# Altium PCB mecanum_car_controller.PcbDoc
Units mil, origin at the board's own origin, x right, y up, seen from the top; angles counter-clockwise.
Board outline 6299.21 x 4133.86 mil, 2 copper layers (Top Layer, Bottom Layer), stack 23.517 mil thick; 44 components, 57 nets, 226 pads, 27 vias.
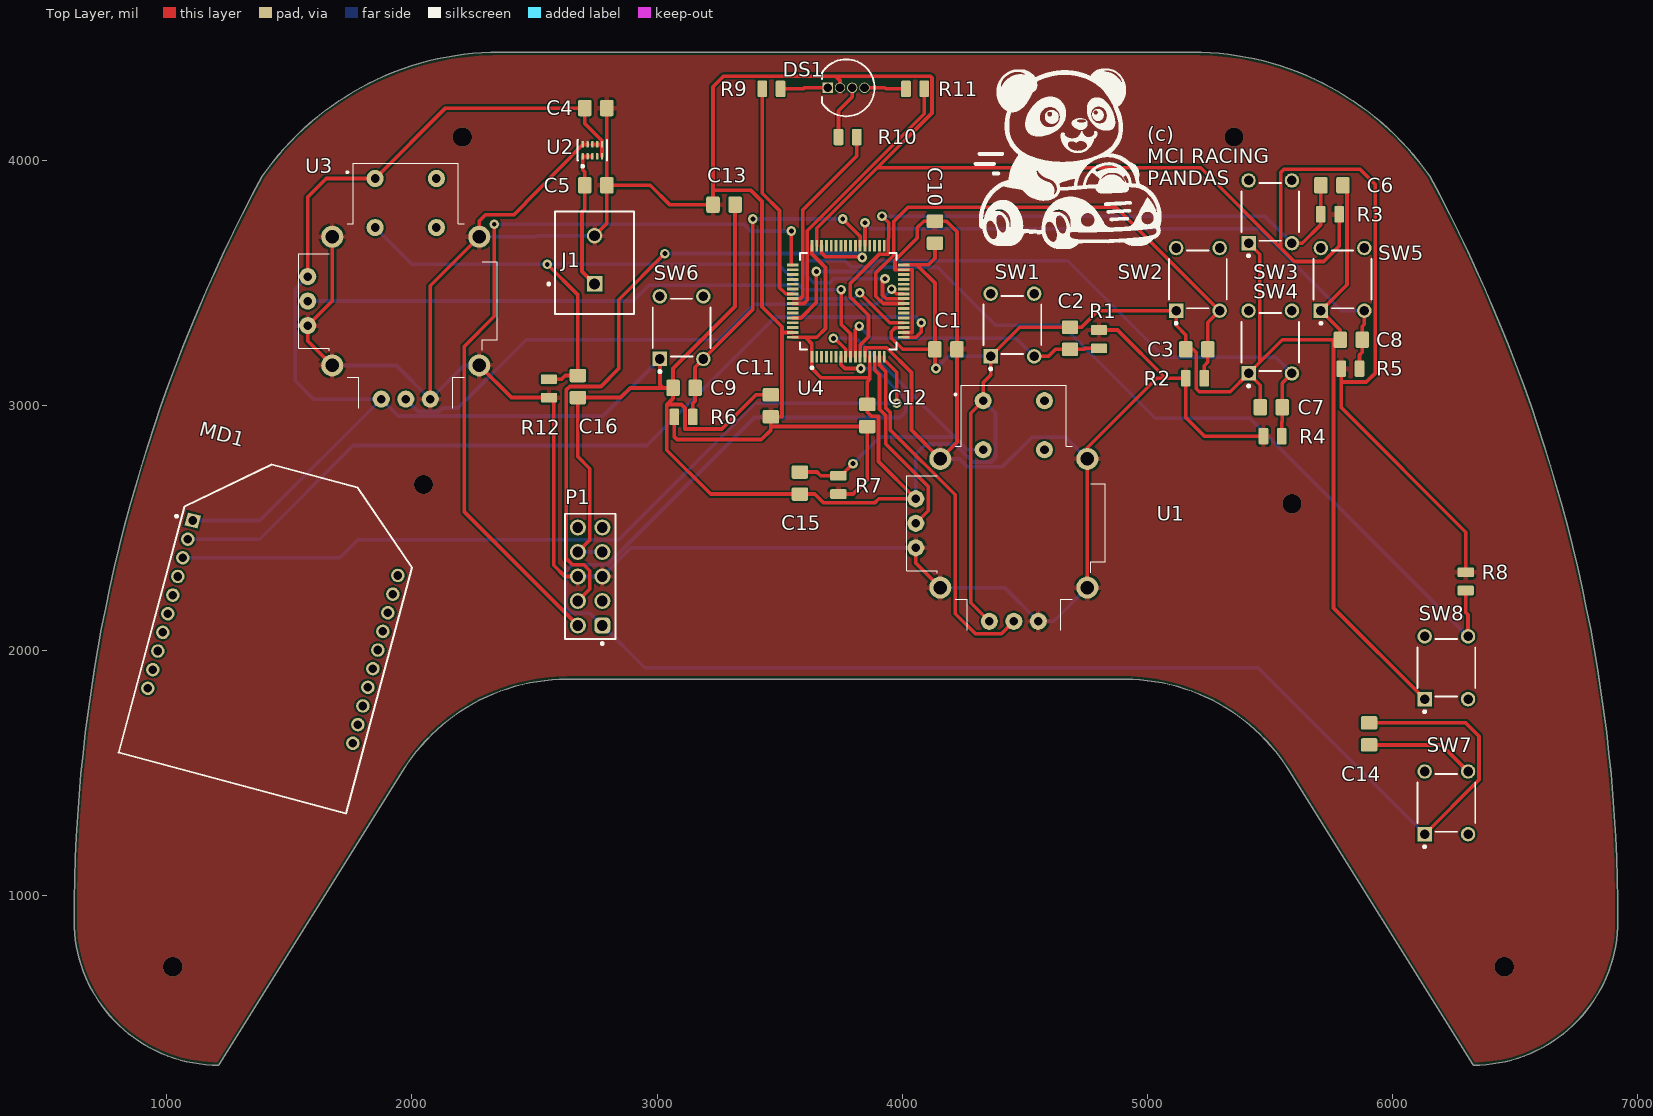
[diagram p0: Top Layer view]
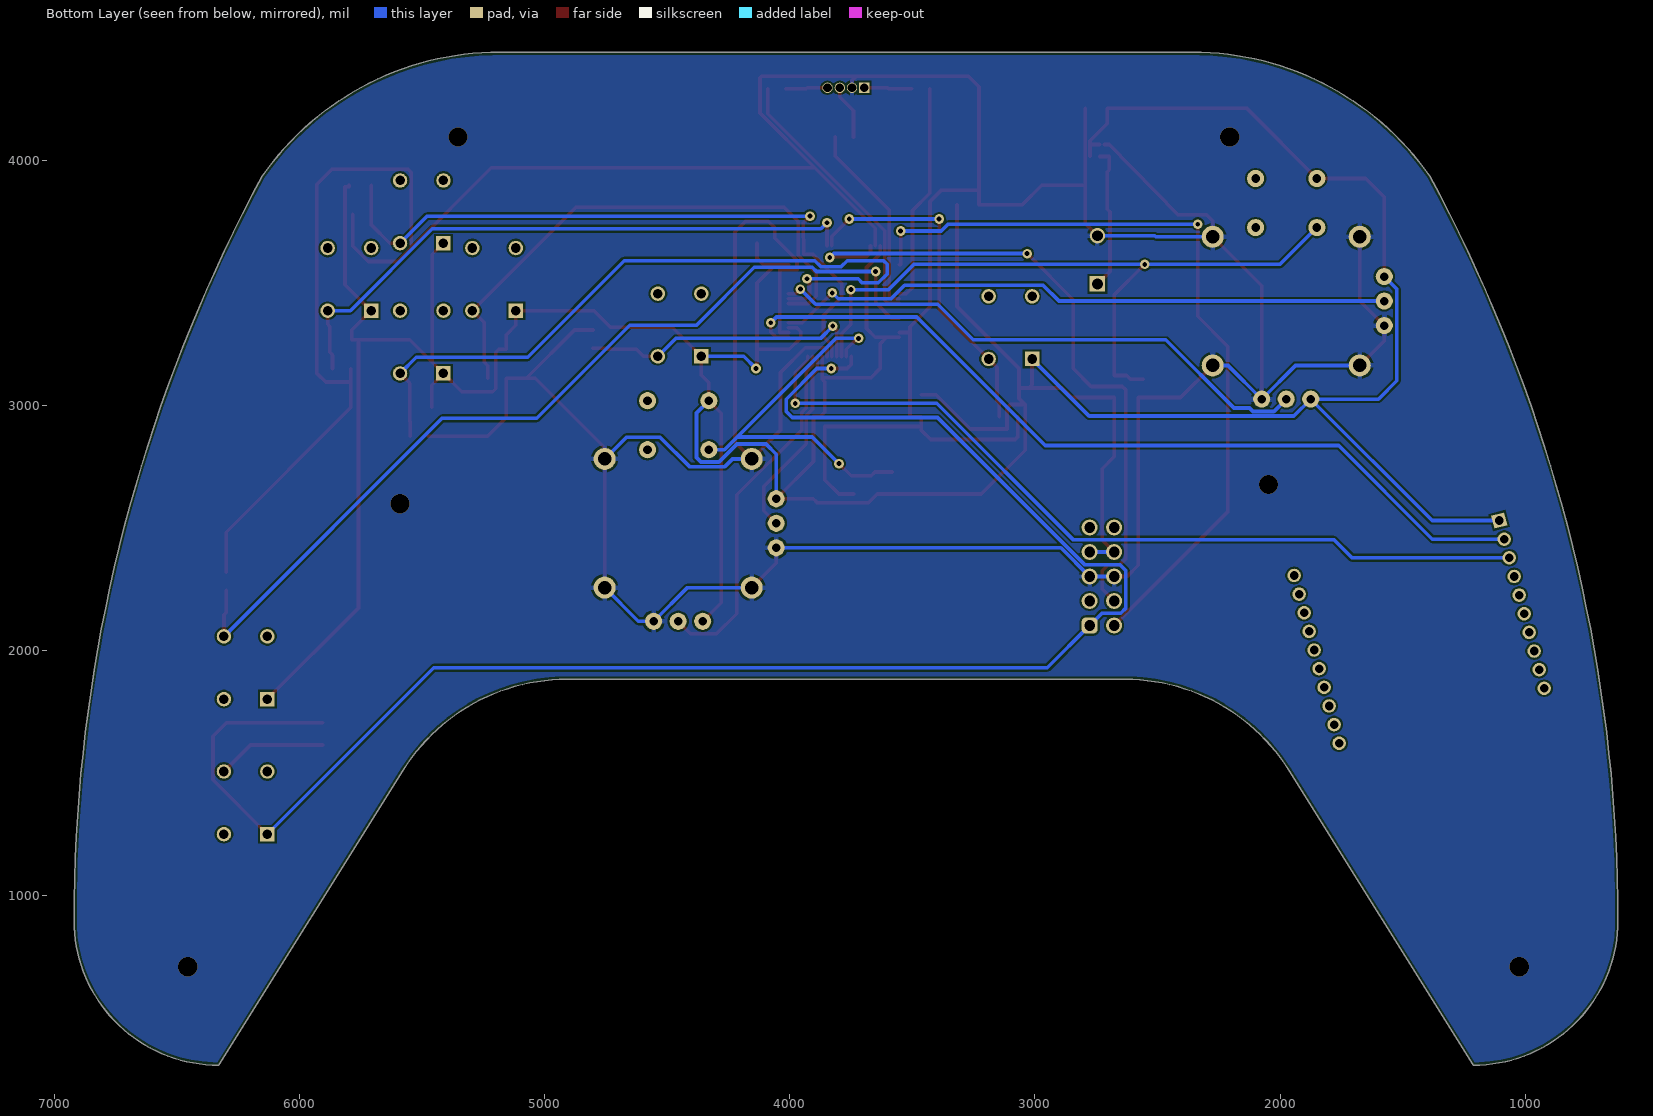
[diagram p1: Bottom Layer view, seen from below]
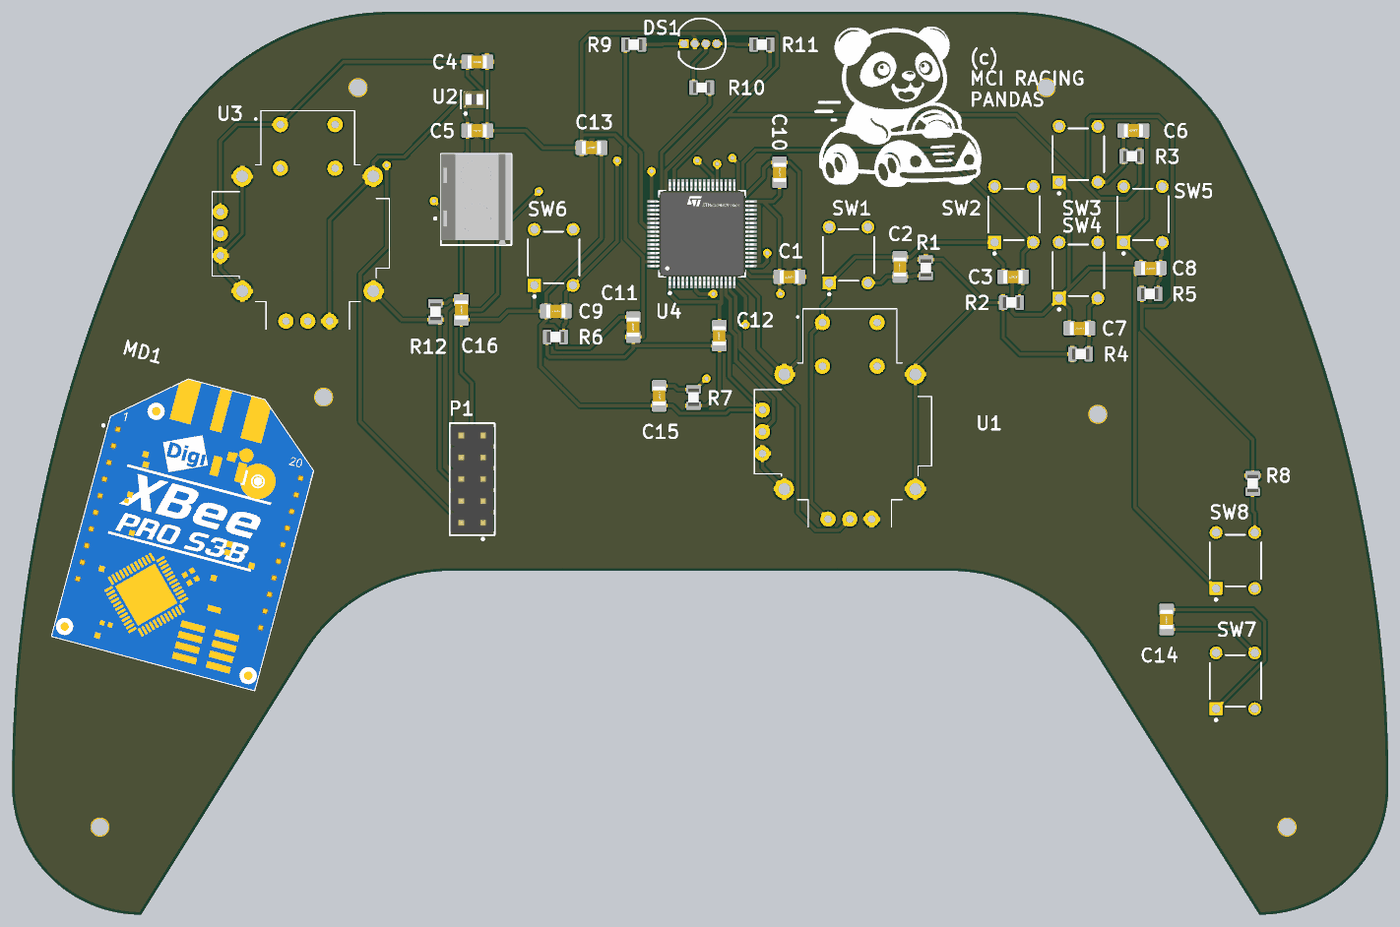
[diagram p2: 3D render of the assembled board from above, using the file's embedded part models]

## Layer stack, top to bottom
Top Solder: solder mask 0.4, Solder Resist, Dk 3.5
Top Layer: signal copper 1.378
Dielectric 2: prepreg 8.284, PP-006, Dk 4.1
Core: core 4.193, FR4, Dk 4.8
Dielectric 3: prepreg 8.284, PP-006, Dk 4.1
Bottom Layer: signal copper 1.378
Bottom Solder: solder mask 0.4, Solder Resist, Dk 3.5

## Board outline
621.41,897.95 ccw(c1211.96,897.95) 1211.96,307.4 1964.91,1512.12 cw(c2632.63,1094.8) 2632.63,1882.2 4909.4,1882.2 cw(c4909.4,1094.8) 5577.12,1512.12 6330.07,307.4 ccw(c6330.07,897.95) 6920.62,897.95 ccw(c530.46,897.95) 6152.74,3935.07 ccw(c5183.47,3260.15) 5183.47,4441.26 2358.56,4441.26 ccw(c2358.56,3260.15) 1389.29,3935.07 ccw(c7011.57,897.95)

## Design rules (kind name [scope] priority, off if disabled: settings)
BoardOutlineClearance [All] p1: gap=11.81 ignorepadtopadclearanceinfootprint=FALSE except(15.75: Arc-SplitBarrior Arc-SplitContinuation Track-SplitBarrior Track-SplitContinuation SMDPad-SplitBarrior SMDPad-SplitContinuation THPad-SplitBarrior THPad-SplitContinuation Via-SplitBarrior Via-SplitContinuation Fill-SplitBarrior Fill-SplitContinuation Poly-SplitBarrior Poly-SplitContinuation Region-SplitBarrior Region-SplitContinuation Text-SplitBarrior Text-SplitContinuation)
Clearance "Clearance Different Nets" [All] p1: gap=7.87 ignorepadtopadclearanceinfootprint=TRUE except(3.5: Arc-Arc Arc-Track Arc-SMDPad Track-Track Track-SMDPad; 3.94: SMDPad-SMDPad; 5: SMDPad-Via THPad-Via Via-Via; 10: Arc-Via Arc-Text Track-Via Track-Text SMDPad-Text THPad-Text Via-Text Fill-Text Poly-Text Region-Text Text-Text; 19.68: THPad-THPad Via-Hole)
Clearance "Clearance Same Nets" [All] p2: gap=7.87 ignorepadtopadclearanceinfootprint=FALSE except(3.5: Arc-Arc Arc-Track Arc-SMDPad Track-Track Track-SMDPad SMDPad-SMDPad; 5: SMDPad-Via THPad-Via; 10: Arc-Via Arc-Text Track-Via Track-Text SMDPad-Text THPad-Text Via-Via Via-Text Fill-Text Poly-Text Region-Text Text-Text)
Clearance "Clearance Bottom Layer" [OnLayer('Bottom Layer')] p3: gap=8 ignorepadtopadclearanceinfootprint=TRUE except(10: Arc-Text Track-Text SMDPad-Text THPad-Text Via-Text Fill-Text Poly-Text Region-Text Text-Text)
Clearance "Clearance Top Layer" [OnLayer('Top Layer')] p4: gap=8 ignorepadtopadclearanceinfootprint=TRUE except(1.18: SMDPad-THPad; 10: Arc-Text Track-Text SMDPad-Text THPad-Text Via-Text Fill-Text Poly-Text Region-Text Text-Text)
HoleSize [All] p1: absolutevalues=TRUE maxlimit=248.03 minlimit=7.87 maxpercent=80.000 minpercent=20.000
MinimumAnnularRing [All] p1: minimumring=5.12
MinimumSolderMaskSliver [All] p1: minsoldermaskwidth=3.94
PolygonConnect PolygonConnect_1 [All] p1: thpad.connectstyle=Relief thpad.reliefconductorwidth=20 thpad.reliefentries=4 thpad.polygonreliefangle="90 Angle" thpad.airgapwidth=10 smdpad.connectstyle=Relief smdpad.reliefconductorwidth=20 smdpad.reliefentries=4 smdpad.polygonreliefangle="90 Angle" smdpad.airgapwidth=10 via.connectstyle=Direct via.reliefconductorwidth=20 via.reliefentries=4 via.polygonreliefangle="90 Angle" via.airgapwidth=10
RoutingCorners [All] p1: cornerstyle=Round minsetback=100 maxsetback=100
RoutingVias [All] p1: holewidth=19.68 width=39.37 viastyle="Through Hole" minholewidth=7.87 minwidth=13.78 maxholewidth=39.37 maxwidth=78.74
SilkToSilkClearance [All] p1: silktosilkclearance=3.94
SilkToSolderMaskClearance [IsPad] p1: minsilkscreentomaskgap=3.94 clearancetoexposedcopper=TRUE
SolderMaskExpansion [All] p1: expansion=4 istentingtop=FALSE
SupplyNets "Schematic Supply Nets_7" [InNet('NetMD1_10')] p1: voltage=0.000
SupplyNets "Schematic Supply Nets_6" [InNet('+BAT')] p2: voltage=0.000
SupplyNets "Schematic Supply Nets_5" [InNet('+3V3')] p3: voltage=0.000
SupplyNets "Schematic Supply Nets_3" [InNet('GND')] p4: voltage=0.000
UnRoutedNet [All] p1: checkbadconnections=TRUE
Width [All] p1: maxlimit=100 minlimit=3.5 preferedwidth=15
24 further rules are at their usual default settings.

## Components (designator, comment, footprint, x,y, rotation, side; value= is the part's Value field where it differs from the comment)
C1 "C_100nF_0805" CAP_0805 4178.86,3228.35 r180 top
C2 "C_100nF_0805" CAP_0805 4685.04,3273.35 r90 top
C3 "C_100nF_0805" CAP_0805 5202.48,3228.35 r180 top
C4 "C_22uF_0805" CAP_0805 2750.28,4212.6 r180 top
C5 "C_4.7uF_0805" CAP_0805 2750.28,3897.64 r180 top
C6 "C_100nF_0805" CAP_0805 5753.66,3897.64 r0 top
C7 "C_100nF_0805" CAP_0805 5506.18,2992.13 r180 top
C8 "C_100nF_0805" CAP_0805 5832.4,3267.72 r180 top
C9 "C_100nF_0805" CAP_0805 3110.24,3070.87 r180 top
C10 "C_100nF_0805" CAP_0805 4133.86,3706.42 r270 top
C11 "C_100nF_0805" CAP_0805 3464.57,2997.76 r90 top
C12 "C_100nF_0805" CAP_0805 3858.27,2958.39 r90 top
C13 "C_100nF_0805" CAP_0805 3273.35,3818.9 r0 top
C14 "C_100nF_0805" CAP_0805 5905.51,1659.17 r90 top
C15 "C_100nF_0805" CAP_0805 3582.68,2682.8 r270 top
C16 "C_100nF_0805" CAP_0805 2677.17,3076.5 r270 top
DS1 "WP154A4SUREQBFZGC" KING-WP154A4SUREQBFZGC_V 3771.46,4295.28 r90 top
J1 "282836-2" TECO-282836-2_V 2745.08,3593.5 r90 top
MD1 "XBP9B-DMUTB002" FP-XBP9B-DMUTB002-MFG 1435,2085 r345 top
P1 "61301021121" 61301021121 2727.17,2301.57 r90 top
R1 "R_10kR_0805" RES_0805 4803.15,3269.68 r90 top
R2 "R_10kR_0805" RES_0805 5194.88,3110.24 r180 top
R3 "R_10kR_0805" RES_0805 5746.06,3779.53 r0 top
R4 "R_10kR_0805" RES_0805 5511.81,2874.02 r180 top
R5 "R_10kR_0805" RES_0805 5828.74,3149.61 r180 top
R6 "R_10kR_0805" RES_0805 3108.27,2952.76 r180 top
R7 "R_10kR_0805" RES_0805 3740.16,2675.2 r270 top
R8 "R_10kR_0805" RES_0805 6299.21,2281.5 r90 top
R9 "R_65R_0805" RES_0805 3466.54,4291.34 r180 top
R10 "R_18R_0805" RES_0805 3777.56,4094.49 r0 top
R11 "R_18R_0805" RES_0805 4053.15,4291.34 r0 top
R12 "R_10kR_0805" RES_0805 2559.06,3068.9 r270 top
SW1 "1825910-6" TECO-1825910-6_V 4449.8,3327.76 r90 top
SW2 "1825910-6" TECO-1825910-6_V 5206.69,3513.78 r90 top
SW3 "1825910-6" TECO-1825910-6_V 5501.97,3789.37 r90 top
SW4 "1825910-6" TECO-1825910-6_V 5501.97,3257.87 r90 top
SW5 "1825910-6" TECO-1825910-6_V 5797.24,3513.78 r90 top
SW6 "1825910-6" TECO-1825910-6_V 3100.39,3316.93 r90 top
SW7 "1825910-6" TECO-1825910-6_V 6220.47,1377.95 r90 top
SW8 "1825910-6" TECO-1825910-6_V 6220.47,1929.13 r90 top
U1 "COM-09032" XDCR_COM-09032 4455.71,2518.7 r0 top
U2 "TPSM82821SILR" FP-SIL0010D-MFG 2736.22,4040.35 r90 top
U3 "COM-09032" XDCR_COM-09032 1974.8,3425.2 r0 top
U4 "STM32F091RCT6" FP-LQFP64-5W-MFG 3779.53,3425.2 r90 top

## Footprints (in the part's own frame and the unit in brackets; to place one, negate y for a bottom-side part, rotate by r counter-clockwise, add the part's x,y. Pads: shape width x height; smd on the part's side, far side on the other; paste and mask are expansions set on the pad)
61301021121 [mm] "Pin Header, pitch 2.54 mm, THT, Vertical, dual row, 10p"
  rrect50% 1.65x1.65 hole 1.1: 1(-5.08,-1.27)
  round 1.65 hole 1.1: 2(-5.08,1.27) 3(-2.54,-1.27) 4(-2.54,1.27) 5(0,-1.27) 6(0,1.27) 7(2.54,-1.27) 8(2.54,1.27) 9(5.08,-1.27) 10(5.08,1.27)
  silkscreen extent -7.08,-2.61 6.5,2.62, body extent -6.35,-2.54 6.35,2.54, height 8.59
CAP_0805 [mm]
  rrect25% 1.4x1.7 smd: 1(-1.143,0) 2(1.143,0)
  body extent -1.15,-0.76 1.15,0.79, height 1.01
FP-LQFP64-5W-MFG [mm]
  rect 1.2x0.3 smd paste+0 mask+0: 1(-5.75,3.75) 2(-5.75,3.25) 3(-5.75,2.75) 4(-5.75,2.25) 5(-5.75,1.75) 6(-5.75,1.25) 7(-5.75,0.75) 8(-5.75,0.25) 9(-5.75,-0.25) 10(-5.75,-0.75) 11(-5.75,-1.25) 12(-5.75,-1.75) 13(-5.75,-2.25) 14(-5.75,-2.75) 15(-5.75,-3.25) 16(-5.75,-3.75) 33(5.75,-3.75) 34(5.75,-3.25) 35(5.75,-2.75) 36(5.75,-2.25) 37(5.75,-1.75) 38(5.75,-1.25) 39(5.75,-0.75) 40(5.75,-0.25) 41(5.75,0.25) 42(5.75,0.75) 43(5.75,1.25) 44(5.75,1.75) 45(5.75,2.25) 46(5.75,2.75) 47(5.75,3.25) 48(5.75,3.75)
  rect 0.3x1.2 smd paste+0 mask+0: 17(-3.75,-5.75) 18(-3.25,-5.75) 19(-2.75,-5.75) 20(-2.25,-5.75) 21(-1.75,-5.75) 22(-1.25,-5.75) 23(-0.75,-5.75) 24(-0.25,-5.75) 25(0.25,-5.75) 26(0.75,-5.75) 27(1.25,-5.75) 28(1.75,-5.75) 29(2.25,-5.75) 30(2.75,-5.75) 31(3.25,-5.75) 32(3.75,-5.75) 49(3.75,5.75) 50(3.25,5.75) 51(2.75,5.75) 52(2.25,5.75) 53(1.75,5.75) 54(1.25,5.75) 55(0.75,5.75) 56(0.25,5.75) 57(-0.25,5.75) 58(-0.75,5.75) 59(-1.25,5.75) 60(-1.75,5.75) 61(-2.25,5.75) 62(-2.75,5.75) 63(-3.25,5.75) 64(-3.75,5.75)
  silkscreen extent -7.02,-5 5,5, body extent -6.45,-6.45 6.45,6.45, height 0.25
FP-SIL0010D-MFG [mm]
  rrect40% 0.65x0.25 smd paste+0 mask+0: 1(-0.625,1) 2(-0.625,0.5) 3(-0.625,0) 4(-0.625,-0.5) 5(-0.625,-1) 6(0.625,-1) 7(0.625,-0.5) 8(0.625,0) 9(0.625,0.5) 10(0.625,1)
  silkscreen extent -1.77,-1.53 1.05,1.52, body extent -1.15,-1.4 1.15,1.4, height 0.25
FP-XBP9B-DMUTB002-MFG [mm]
  rect 1.4x1.4 hole 0.9 paste-2539.97 mask+0: 1(-11,8.75)
  round 1.4 hole 0.9 paste-2539.97 mask+0: 2(-11,6.75) 3(-11,4.75) 4(-11,2.75) 5(-11,0.75) 6(-11,-1.25) 7(-11,-3.25) 8(-11,-5.25) 9(-11,-7.25) 10(-11,-9.25) 11(11,-9.25) 12(11,-7.25) 13(11,-5.25) 14(11,-3.25) 15(11,-1.25) 16(11,0.75) 17(11,2.75) 18(11,4.75) 19(11,6.75) 20(11,8.75)
  silkscreen extent -12.86,-16.47 12.19,16.47, body extent -12.29,-16.57 12.29,16.57, height 0.25
KING-WP154A4SUREQBFZGC_V [mm] "THD, 4-Leads, Dia 5.9mm, Pitch 1.27mm"
  rect 1.07x1.07 hole 0.889 paste-2539.97: 1(0,1.905)
  round 1.07 hole 0.889 paste-2539.97: 2(0,0.635) 3(0,-0.635) 4(0,-1.905)
  silkscreen extent -2.95,-2.95 2.95,2.5
RES_0805 [mm]
  rrect25% 1x1.7 smd: 1(-0.95,0) 2(0.95,0)
  body extent -1,-0.63 1,0.63, height 0.47
TECO-282836-2_V [mm] "Female Header, Pitch 5mm, 1 x 2 Position, Height 10mm"
  rect 1.6x1.6 hole 1.1: 1(-2.5,0)
  round 1.6 hole 1.1: 2(2.5,0)
  silkscreen extent -5.6,-4.1 5,4.87, body extent -5.6,-4.1 5,4.1, height 10
TECO-1825910-6_V [mm] "Switch, 4-Leads, Body 5.99x5.99mm"
  rect 1.5x1.5 hole 0.99: 1(-3.25,2.25)
  round 1.5 hole 0.99: 2(3.25,2.25) 3(-3.25,-2.25) 4(3.25,-2.25)
  silkscreen extent -4.67,-2.99 3,2.99, body extent -3,-2.99 2.99,3, height 5
XDCR_COM-09032 [mil]
  round 70 hole 35.43: B1A(-125,500) B1B(125,500) B2A(-125,300) B2B(125,300)
  round 70 hole 35: H1(-100,-400) H2(0,-400) H3(100,-400) V1(-400,100) V2(-400,0) V3(-400,-100)
  round 90 hole 55: S1(-300,262.5) S2(-300,-262.5) S3(300,-262.5) S4(300,262.5)
  silkscreen extent -437,-437 374,563

## Part data
C1 C2 C3 C4 C5 C6 C7 C8 C9 C10 C11 C12 C13 C14 C15 C16: library part CAP_0805, "Capacitor SMD 0805"
DS1: library part CMP-2000-07415-1, "Full Color LED Lamp, Dominant Wavelength RGB 630 / 525 / 465 nm, -40 to 85 degC, 4-Pin THD, RoHS", Color=Red,Green,Blue(RGB), Current - Test=20mA, Manufacturer=Kingbright, Millicandela Rating=1300mcdRed,1700mcdGreen,900mcdBlue, Package / Case=Radial-4Leads, Package Description="4-Pin Through Hole LED, Dia 5.9 mm, Pitch 1.27 mm", Standard Package=500, Voltage - Forward (Vf) (Typ)=1.9VRed,3.3VGreen,3.3VBlue, 3D Model="WP154A4SUREQBFZGW.sldprt /  / WP154A4SUREQBFZGW.pro /  / WP154A4SUREQBFZGW.igs /  / WP154A4SUREQBFZGW.stp", Category=Optoelectronics, Datasheet URL=https://www.kingbrightusa.com/images/catalog/spec/WP154A4SUREQBFZGC.pdf, Datasheet Version="Rev. 5A, 08/2014", Family=LEDIndication-Discrete, Height=8.60mm, Lens Style/Size=RoundwithDomedTop,5mm,T-13/4, Lens Type=Clear, Manufacturer URL=http://www.kingbright.com/, Mounting Technology=ThroughHole, Mounting Type=ThroughHole, Online Catalog=5mm,T-13/4(RGB)RoundwithDomedTopLEDLamp, Other Names="754-1615 / WP154A4SUREQBFZGC-ND", Package Reference=WP154A4SUREQBFZGC, Packaging=Bulk, Viewing Angle=50°, Wavelength - Dominant=630nm,525nm,465nm, Wavelength - Peak=645nm,515nm,460nm
J1: library part CMP-1684-00017-1, "Female Header, Pitch 5 mm, 1 x 2 Position, Height 10 mm, Tail Length 3.5 mm, Rohs, Bulk", Color=Green, Current=13.5A, Manufacturer="TE Connectivity", Package Description="Female Header, Pitch 5 mm, 1 x 2 Position, Height 10 mm, Tail Length 3.5 mm", Package Reference=THD, Standard Package=300, Voltage=300V, 3D Model=282836-2.pdf, Category=Connectors,Interconnects, Clamp Material - Plating=Brass-NickelPlated, Contact Material - Plating=Brass-TinPlated, Datasheet URL=http://www.te.com.cn/commerce/DocumentDelivery/DDEController?Action=showdoc&DocId=Catalog+Section%7F1308389_EUROSTYLE_TERMINAL_BLOCKS%7F0607%7Fpdf%7FEnglish%7FENG_CS_1308389_EUROSTYLE_TERMINAL_BLOCKS_0607.pdf%7F282836-2, Dynamic Catalog=BuchananSeries, Family=TerminalBlocks-WiretoBoard, Featured Product=EurostyleTerminalBlockConnectors, Features=Interlocking(Side), Housing Material=Polyamide(PA66),Nylon6/6, Manufacturer URL=http://www.te.com, Mating Orientation=HorizontalwithBoard, Mounting Type=ThroughHole, Number of Levels=1, Other Names="5ULV-02B / A98076", Packaging=Bulk, Pitch="0.197\"(5.00mm)", Positions Per Level=2, Product Training Modules=Wire-to-BoardEurostyleTerminalBlocks, RoHS Information=282836-2StatementofCompliance, Screw Material - Plating=Brass-NickelPlated, Screw Thread=M3, Series=Buchanan, Torque - Screw=0.68Nm(6Lb-In), Wire Gauge=16-30AWG, Wire Termination=Screw-RisingCageClamp
MD1: library part CMP-84319-000004-1, "RX TXRX MOD ISM < 1GHZ U.FL TH", Case/Package=Module, Current - Receiving=29mA, Current - Transmitting=215mA, Frequency=900MHz, Max Frequency=928MHz, Max Operating Temperature=85°C, Max Supply Voltage=3.6V, Min Frequency=902MHz, Min Operating Temperature=-40°C, Min Supply Voltage=2.4V, Output Power (dBm)=24dBm, Package Quantity=1, Data Rate=200Kbps, Interface=SPI, Memory Size=2KB, Number of Pins=20, Packaging=Bulk, Radiation Hardening=No, RAM Size=2KB, Sensitivity=-101dBm, Series=XBee-Pro™
P1: library part CMP-1502-01084-3, Color=Black, Contact Resistance=20mΩ, Current Rating=3A, Flammability Rating="UL94 V-0", Insulation Resistance=1GΩ, Max Operating Temperature=105°C, Min Operating Temperature=-40°C, Operating Supply Voltage=250V, Connector Type="Male Pin", Contact Gender=Male, Contact Material=Copper, Contact Mating Length=5.9944mm, Contact Plating=Gold, Gender=Male, Height=2.54mm, Housing Material=PBT, Insulation=Insulated, Lead Pitch=2.54mm, Length=12.7mm, Mount="Through Hole", NexarPartId=18818163, Number of Contacts=10, Number of Pins=10, Number of Positions=10, Number of Rows=2, Orientation=Vertical, Packaging=Bulk, Pitch=2.54mm, REACH SVHC=Unknown, RoHS=Compliant, Row Spacing=2.54mm, Termination="Through Hole", Voltage Rating=250V, Width=12.7mm
R1 R2 R3 R4 R5 R6 R7 R8 R9 R10 R11 R12: library part RES_0805, "Resistor SMD 0805"
SW1 SW2 SW3 SW4 SW5 SW6 SW7 SW8: library part CMP-1684-00021-1, "Tact Switch, SPST-NO, 0.05 A, -35 to 85 degC, 4-Pin THD, RoHS, Bulk", Actuator Color=Black, Contact Rating @ Voltage=0.05A@24VDC, Dielectric Strength=500VAC, Manufacturer="TE Connectivity", Maximum AC Voltage Rating=N/A, Maximum Contact Resistance=100mOhm, Maximum DC Voltage Rating=24V, Minimum Insulation Resistance=100MOhm, Operating Temperature=-35to85C, Package Description="4-Pin Through Hole Device, Body 5.99 x 5.99 mm, Pitch 6.5 mm", Package Reference=THD, Actuator Length=1.4mm, Actuator Material=PolybutyleneTerephthalate, Actuator Style=RoundButton, Base Material=N/A, Body Orientation=Straight, Bushing Type=Unthreaded, Contact Material=CopperAlloy, Contact Plating=Silver, Datasheet URL=http://www.te.com/commerce/DocumentDelivery/DDEController?Action=showdoc&DocId=Customer+Drawing%7F1825910%7FC9%7Fpdf%7FEnglish%7FENG_CD_1825910_C9.pdf%7F1825910-6, Datasheet Version="Rev. C9", Dimension=5.99x5mm, Electrical Life=100000Cycles, Family=1825910, Function=MomentaryContact, Housing Material=N/A, Illumination=N/R, Manufacturer URL=http://www.te.com, Mechanical Life=100000Cycles, mounting=ThroughHole, Packaging=N/A, Part No=1825910-6, Pole Throw Configuration=SPST, Product Weight=N/A, RoHS=Yes, Seal Description=N/A, Seal Location=N/A, Switch Configuration=OFF(ON), Terminal Type=PCPins, Thread Size=N/R
U1 U3: library part CMP-032-000000-1, "Thumb Joystick", Package=None, Availability=Unavailable, Component Type=Standard, Design Item ID=COM-09032, MP=COM-09032, Pin Count=12, Price=None, Source=COM-09032.SchLib
U2: library part CMP-04918-000191-1, "5.5-V INPUT, 1-A STEP-DOWN MODUL", RoHS Compliant=Yes
U4: library part CMP-0304-00199-4, "IC MCU 32BIT 256KB FLASH 64LQFP", Ambient Temperature Range High=+85°C, Ambient Temperature Range Low=-40°C, Frequency=48MHz, Manufacturer=STMicroelectronics, Max Junction Temp=+105°C, Max Supply Voltage=3.6V, Min Supply Voltage=2V, Nominal Supply Current=0.9-26.9mA, Package=LQFP64-5W, Temperature="-40°C to +85°C", Automotive=No, Category=IC, ComponentLink2Description=Datasheet, ComponentLink2URL=https://www.st.com/resource/en/datasheet/stm32f091rc.pdf, Core Architecture="ARM Cortex-M0", Data Bus Width=32bits, Device Class L1="Integrated Circuits (ICs)", Device Class L2="Embedded Processors and Controllers", Device Class L3=Microcontrollers, Digikey Description="IC MCU 32BIT 256KB FLASH 64LQFP", Height=1.6mm, Interface=I2C,SPI,USART,CAN,LIN,IrDA,I2S,SMBus, Ipc Land Pattern Name=QFP50P1200X1200X160-64, Lead Free=Yes, Manufacturer Part Number=STM32F091RCT6, Memory Size=256KBytes, Memory Type=FLASH, Mouser Description="ARM Microcontrollers - MCU 16/32-BITS MICROS", Number Of A/D Converters=1, Number Of Adc Channels=19, Number Of Cores=1, Number Of I2C Channels=2, Number Of I/Os=52, Number Of Pwm Channels=6, Number Of Spi Channels=2, Number Of Timers/Counters=10, Number Of Uart Channels=8, Octopart=https://octopart.com/stm32f091rct6-stmicroelectronics-51988683, RAM Size=32KBytes, RoHS=TRUE, Standoff Height=0.05mm, Temperature Range High=+85°C, Temperature Range Low=-40°C

## Via types
v1: diameter 39.37, hole 19.68, Top Layer to Bottom Layer, 21 vias
v2: diameter 78.74, hole 78.74, Top Layer to Bottom Layer, 6 vias

## Nets (pads, with @x,y where several pads share a name; then routed paths per layer and width w, separated by ;. In a path a pad name is that pad's centre, name@x,y a point inside that pad or via, vN(x,y) a via of type N, cw(c..) or ccw(c..) an arc to the next point about the centre after c; other vN are vias at no path point)
+3V3: C1.2 C2.2 C3.2 C4.2 C6.2 C7.2 C8.2 C9.2 C10.2 C11.2 C12.2 C13.2 C15.2 C16.2 MD1.1 P1.7 P1.8 SW1.1 SW2.1 SW3.1 SW4.1 SW5.1 SW6.1 SW8.1 U1.B1A U1.H1 U1.V1 U2.5 U2.6 U2.7 U2.8 U3.B1A U3.H1 U3.V1 U4.1 U4.13 U4.19 U4.32 U4.48 U4.64 | length 18651.4
  Top Layer w15: U3.V1 1574.8,3850 1650,3925.2 U3.B1A 2137.21,4212.6 C4.2 2705.28,4150 2775.59,4079.69 U2.6 U2.6@2775.59,4064 ; P1.8 2726,2450.41 2726,2741.17 2677.17,2790 C16.2 2851,3031.5 2890.37,3070.87 3025,3070.87 ; U2.8 2736.22,4064 U2.7@2755.91,4064 ; U2.7 U2.7@2755.91,4064 ; U2.5 U2.6@2775.59,4064 ; SW6.1 3011.81,3084.05 3025,3070.87 ; C13.2 3318.35,3403.11 3065.24,3150 C9.2 ; C11.2 3404,3042.76 3264.24,2903 3114,2903 3114,2989 3100,3003 3040,3003 ; U4.64 3604.33,3277.56 ; U4.48 3631.89,3617.8 3687.19,3562.5 3687.19,3312.93 3651.81,3277.56 3604.33,3277.56 ; U4.13 3868.11,3187.7 3868.19,3187.7 3868.19,3112.81 ; U4.19 3972.93,3316.93 3956,3300 3956,3275 4002.65,3228.35 C1.2 ; U4.32 4060,3572.83 ; C10.2 4133.86,3600 4106.69,3572.83 4060,3572.83 ; v1(4138,3150) 4133.86,3154.14 C1.2 ; U1.H1 4280,2194.41 4280,2967.99 U1.B1A 4330.71,3093 4361.22,3123.51 SW1.1 4479.76,3318.35 C2.2 4732,3318.35 4799.48,3385.83 SW2.1 5118.11,3326.37 5157.48,3287 C3.2 5187.5,3228.35 5200,3215.85 5200,3067.5 5212.5,3055 5338.46,3055 SW4.1 ; SW3.1 5459,3615.8 5459,3175.54 ; C7.2 5461.18,3082.13 SW4.1 ; C6.2 5798.66,3892 5815,3892 5815,3492.16 SW5.1 5787.4,3307.09 C8.2 C8.2@5760,3267.72 ; SW8.1 5760,2173.07 C8.2@5760,3267.72 ; U2.7@2755.91,4064 U2.6@2775.59,4064 ; 3025,3070.87 C9.2 ; 3040,3003 3065.24,3028.24 C9.2 ; 3040,3003 3040,2817 3219.2,2637.8 C15.2 3643.2,2637.8 3678,2603 3889.3,2603 3905,2618.7 U1.V1 3903.81,2770.59 3903.81,2955 3875,2955 3858.27,2971.73 C12.2 3858.27,3096 3868.19,3105.92 3868.19,3112.81 ; 3604.33,3277.56 3631.89,3250 U4.1 3631.89,3150 3669.08,3112.81 3868.19,3112.81 ; 4060,3572.83 4133.86,3498.98 C1.2 ; SW4.1 5459,3175.54 ; 5459,3175.54 5551.18,3267.72 C8.2@5760,3267.72
  Bottom Layer w15: MD1.1 1379.45,2529.84 U3.H1 ; U3.V1 1524,3474.39 1524,3100 1598.8,3025.2 U3.H1 ; P1.8 P1.7 ; SW6.1 2779.16,2956.32 1943.68,2956.32 U3.H1 ; U1.V1 4055.71,2800 4097.71,2842 4216,2842 4289.67,2768.33 4362.5,2768.33 4381.08,2786.91 4381.08,2968.33 U1.B1A ; v1(4138,3150) 4187.8,3199.8 SW1.1
+BAT: C5.2 J1.1 U2.1 U2.2 U2.3 | length 590.9
  Top Layer w15: U2.1 U2.1@2696.85,4015 ; U2.2 U2.2@2716.54,4015 ; U2.3 2736.22,4015 U2.2@2716.54,4015 ; J1.1 2694,3546.16 2694,3788.72 2705.28,3800 C5.2 2705.28,3952 2696.85,3960.43 U2.1@2696.85,4015 ; U2.1@2696.85,4015 U2.2@2716.54,4015
GND: C1.1 C4.1 C5.1 C10.1 C11.1 C12.1 C13.1 DS1.2 J1.2 P1.5 P1.6 R1.2 R2.2 R3.2 R4.2 R5.2 R6.2 R7.2 R8.2 R12.2 U1.H3 U1.S1 U1.S2 U1.S3 U1.S4 U1.V3 U2.9 U2.10 U3.H3 U3.S1 U3.S2 U3.S3 U3.S4 U3.V3 U4.12 U4.18 U4.31 U4.47 U4.63 | length 22471.4
  Top Layer w15: U3.S2 1574.8,3262.7 U3.V3 1674.8,3425.2 U3.S1 ; U3.H3 2074.8,3487.7 U3.S4 2274.8,3751.8 2300,3777 2416.85,3777 U2.10@2696.85,4064 ; U3.S3 2406,3031.5 R12.2 2579,3031.5 2579,2347.57 2625,2301.57 P1.6 ; U2.10 U2.10@2696.85,4064 ; U2.9 2716.54,4064 U2.10@2696.85,4064 ; J1.2 2795.28,3742.13 C5.1 ; C4.1 2795,4212.6 2795,3897.64 C5.1 ; R6.2 3070.87,2870.72 3081.08,2860.51 3425.51,2860.51 3464.57,2899.57 3464.57,2913.39 ; U4.63 3510,3297.24 ; U4.47 3651.57,3722.13 3898.44,3969 ; R7.2 3800,2637.8 3858.27,2696.06 C12.1 3464.57,2913.39 ; DS1.2 3746.46,4325 3728.46,4343 ; U4.12 3848.43,3235.03 3936.97,3235.03 4038.16,3133.84 4038.16,2898.75 U1.S1 4223.86,2849.35 C1.1 4223.86,3708.56 4181,3751.42 C10.1 4088.42,3751.42 4062,3725 4062,3682.34 3971,3591.34 3971,3553.15 U4.31 4040.81,3553.15 4040.81,3297.24 U4.18 ; U1.V3 4055.71,2356.2 U1.S2 ; U1.S3 U1.S4 4755.71,2826.71 5039,3110 5076.09,3110 ; R1.2 4879,3307.09 5076.09,3110 ; R2.2 R2.2@5157.48,3110 ; R4.2 5233.48,2874 5157.48,2950 R2.2@5157.48,3110 ; R3.2 5783.46,3650 5720.46,3587 5600,3587 5545,3642 ; R5.2 5791.34,3112.5 5791.34,3095 ; R8.2 6300,2318.9 6300,2482 5791.34,2990.66 5791.34,3095 ; C5.1 2972,3897.64 3050.74,3818.9 C13.1 3228.35,3878 ; 3228.35,3878 3228.35,4300 3271.35,4343 3728.46,4343 ; 3228.35,3878 3381.69,3878 3428.19,3831.5 3428.19,3401.81 3510,3320 3510,3297.24 ; 3464.57,2913.39 C11.1 3510,2952.76 3510,3297.24 ; 3728.46,4343 4115.86,4343 4122,4336.86 4122,4192.56 3898.44,3969 ; 3898.44,3969 5218,3969 5545,3642 ; 5076.09,3110 R2.2@5157.48,3110 ; 5545,3642 5545,3950 5558,3963 5868,3963 5931,3900 5931,3132 5894,3095 5791.34,3095
  Bottom Layer w15: U3.S2 1937.3,3162.7 U3.H3 2212.3,3162.7 U3.S3 ; U3.S4 2507,3687.7 2511.23,3691.93 J1.2 ; P1.6 P1.5 2894.29,2418.7 U1.V3 ; U1.S2 4418.21,2256.2 U1.H3 4618.21,2118.7 U1.S3 ; U1.S1 4233.8,2781.2 4265.17,2749.83 4409.83,2749.83 4530,2870 4666.91,2870 U1.S4
  other v2: 1023.62,708.66 6456.69,708.66 5590.55,2598.43 2047.24,2677.17 2204.72,4094.49 5354.33,4094.49
MCU_NRST: C14.2 P1.1 SW7.1 U4.7 | length 7061.6
  Top Layer w15: U4.7 3750,3166.78 3766.78,3150 v1(3831,3150) ; C14.2 6300,1704.17 6354,1650.17 6354,1472.11 SW7.1
  Bottom Layer w15: v1(3831,3150) 3890.19,3150 4015.19,3025 4015.19,2975 3990.19,2950 3398,2950 2798,2350 2654,2350 2629,2325 2629,2173 2650,2152 2726.74,2152 P1.1 2949.74,1929 5452.89,1929 SW7.1
MCU_PA0: U1.V2 U4.14 | length 792.2
  Top Layer w15: U4.14 3887.8,3145 3908,3124.8 3908,2984.18 3933.5,2958.68 3933.5,2842.5 4107,2669 4107,2569.99 U1.V2
MCU_PA1: U1.H2 U4.15 | length 1470.7
  Top Layer w15: U4.15 3907.48,3164.2 3933.5,3138.18 3933.5,2989.31 3952,2970.81 3952,2899.53 4217,2634.53 4217,2150 4299,2068 4405.01,2068 U1.H2
MCU_PA2: MD1.3 U4.16 | length 3385.9
  Top Layer w15: U4.16 3927.17,3186 3978,3135.17 v1(3978,3008)
  Bottom Layer w15: MD1.3 1706.72,2377.72 1781,2452 2844.59,2452 3400.59,3008 v1(3978,3008)
MCU_PA3: MD1.2 U4.17 | length 3496.7
  Top Layer w15: U4.17 4056.87,3277.56 4078,3298.69 v1(4078,3337)
  Bottom Layer w15: MD1.2 1378.78,2453.78 1761,2836 2958,2836 3482.19,3360.19 4054.81,3360.19 v1(4078,3337)
MCU_PA4: U3.V2 U4.20 | length 2541.4
  Top Layer w15: v1(3827,3458.81) 3949.2,3336.61 U4.20
  Bottom Layer w15: U3.V2 2902.2,3425.2 2967,3490 3531.94,3490 3587.19,3434.76 3802.94,3434.76 v1(3827,3458.81)
MCU_PA5: U4.21
MCU_PA6: U4.22
MCU_PA7: U4.23
MCU_PA8: U4.41
MCU_PA9: U4.42
MCU_PA10: U4.43
MCU_PA11: U4.44
MCU_PA12: U4.45
MCU_PA13: P1.4 U4.46 | length 2761.7
  Top Layer w15: P1.4 2726,2250.41 2726,2325 2701,2350 2654,2350 2629,2375 2629,3062.5 2643.5,3077 2771,3077 2844,3150 2844,3431 v1(3032,3619) ; U4.46 3671.26,3622.24 3687.5,3606 3834,3606 v1(3837,3603)
  Bottom Layer w15: v1(3032,3619) 3821,3619 v1(3837,3603)
MCU_PA14: P1.2 U4.49 | length 3246.8
  Top Layer w15: v1(2336,3739) 2336,3363 2214,3241 2214,2564.74 P1.2 ; v1(3548,3711.14) 3548,3572.83 U4.49
  Bottom Layer w15: v1(2336,3739) 3354.76,3739 3382.63,3711.14 v1(3548,3711.14)
MCU_PA15: U4.50
MCU_PB0: U3.H2 U4.26 | length 2266.7
  Top Layer w15: v1(3957,3474) 3976.28,3454.72 U4.26
  Bottom Layer w15: U3.H2 2025.18,2974.82 2110.82,2974.82 2125,2989 2188,2989 2466,3267 3252,3267 3397,3412 3895,3412 v1(3957,3474)
MCU_PB1: U4.27
MCU_PB2: U4.28
MCU_PB3: R9.2 U4.55 | length 904.5
  Top Layer w15: R9.2 3429.13,3865.69 3500,3794.82 3500,3479.72 3525,3454.72 U4.55
MCU_PB4: R10.2 U4.56 | length 786.8
  Top Layer w15: U4.56 3585.45,3435.04 3594,3443.59 3594,3796.04 3814.96,4017 R10.2
MCU_PB5: R11.2 U4.57 | length 1126
  Top Layer w15: U4.57 3600,3415.35 3612.81,3428.17 3612.81,3711.81 4090.55,4189.55 R11.2
MCU_PB6: U4.58
MCU_PB7: U4.59
MCU_PB8: U4.61
MCU_PB9: U4.62
MCU_PB10: U4.29
MCU_PB11: U4.30
MCU_PB12: U4.33
MCU_PB13: U4.34
MCU_PB14: U4.35
MCU_PB15: U4.36
MCU_PC0: C15.1 R7.1 U1.B2A U4.8 | length 1601.3
  Top Layer w15: C15.1 3653,2727.8 3668.2,2712.6 R7.1 3750,2712.6 v1(3799.4,2762) ; v1(3719.69,3273) 3725,3273 3769.69,3228.31 U4.8
  Bottom Layer w15: v1(3719.69,3273) 3812.82,3273 4214.82,2871 ; v1(3799.4,2762) 3908.4,2871 4214.82,2871 ; U1.B2A 4267.12,2818.7 4214.82,2871
MCU_PC1: C16.1 R12.1 U3.B2A U4.9 | length 2924.9
  Top Layer w15: v1(2552,3575) 2677.17,3449.83 C16.1 2625.2,3121.5 2610,3106.3 R12.1 ; v1(3751,3472) 3751,3330.37 3789.37,3292 U4.9
  Bottom Layer w15: U3.B2A 2000,3575 v1(2552,3575) 3494,3575 3597,3472 v1(3751,3472)
MCU_PC2: C2.1 R1.1 SW1.3 U4.10 | length 1173.4
  Top Layer w15: U4.10 3809.06,3307.06 v1(3825,3323) ; SW1.3 4597,3199.8 4625.54,3228.35 C2.1 4742,3228.35 4745.94,3232.28 R1.1
  Bottom Layer w15: v1(3825,3323) 3875,3273 4465.19,3273 SW1.3
MCU_PC3: C6.1 R3.1 SW3.3 U4.11 | length 2742.7
  Top Layer w15: U4.11 3828.74,3245.74 3863,3280 3863,3367 3789,3441 3789,3498 3907.95,3616.95 3944,3616.95 3945,3745 v1(3918,3772) ; SW3.3 5632.58,3661.42 5708.66,3737.5 R3.1 C6.1
  Bottom Layer w15: v1(3918,3772) 5479.97,3772 SW3.3
MCU_PC4: C3.1 R2.1 SW2.3 U4.24 | length 2290.4
  Top Layer w15: U4.24 3922.77,3415.35 3892.82,3445.31 3892.82,3539.32 3966,3612.5 3966,3750 4024,3808 4873.1,3808 SW2.3 5247.48,3338.03 C3.1 5247.48,3176.2 5232.28,3161 R2.1
MCU_PC5: C7.1 R4.1 SW4.3 U4.25 | length 3027.4
  Top Layer w15: v1(3930,3516) 3919.81,3505.81 3919.81,3450 3934.77,3435.04 U4.25 ; R4.1 5549.21,2932 5551.18,2933.97 C7.1 5551.18,3090.55 SW4.3
  Bottom Layer w15: v1(3930,3516) 3721.44,3516 3705.44,3500 3639,3500 3603,3536 3603,3575 3618,3590 3766.3,3590 3790.49,3565.81 3873.87,3565.81 3898.06,3590 4676,3590 5070,3196 5524.47,3196 SW4.3
MCU_PC6: C8.1 R5.1 SW5.3 U4.37 | length 2524
  Top Layer w15: U4.37 v1(3848.43,3745) ; R5.1 5866.14,3204.75 5877.4,3216.01 C8.1 5877.4,3322 5885.83,3330.42 SW5.3
  Bottom Layer w15: v1(3848.43,3745) 3873.43,3720 5459,3720 5793.17,3385.83 SW5.3
MCU_PC7: C9.1 R6.1 SW6.3 U4.38 | length 1413.4
  Top Layer w15: R6.1 3145.67,3007 3155.24,3016.57 C9.1 3155.24,3155.24 SW6.3 3391,3391 v1(3391,3760) ; v1(3757.74,3760) 3828.74,3689 U4.38
  Bottom Layer w15: v1(3391,3760) v1(3757.74,3760)
MCU_PC8: U4.39
MCU_PC9: U4.40
MCU_PC10: U4.51
MCU_PC11: U4.52
MCU_PC12: U4.53
MCU_PC13: U4.2
MCU_PD2: U4.54
NetC14_1: C14.1 SW7.4 | length 448.4
  Top Layer w15: C14.1 6200.79,1614.17 SW7.4
NetDS1_1: DS1.1 R9.1 | length 194.1
  Top Layer w15: R9.1 3598,4291.34 3601.94,4295.28 DS1.1
NetDS1_3: DS1.3 R10.1 | length 224.1
  Top Layer w15: R10.1 3740.16,4202 3796.46,4258.3 DS1.3
NetDS1_4: DS1.4 R11.1 | length 170.9
  Top Layer w15: DS1.4 3929,4295.28 3932.94,4291.34 R11.1
NetMD1_10: MD1.10
NetR8_1: R8.1 SW8.4 U4.60 | length 3730.5
  Top Layer w15: U4.60 3587,3356.3 3650,3419.3 v1(3650,3546) ; R8.1 6299.21,2154.84 6309.06,2145 SW8.4
  Bottom Layer w15: v1(3650,3546) 3891.37,3546 3908.3,3562.93 4145.07,3562.93 4381,3327 4653,3327 5033,2947 5419.14,2947 SW8.4
pads on no net: MD1.4 MD1.5 MD1.6 MD1.7 MD1.8 MD1.9 MD1.11 MD1.12 MD1.13 MD1.14 MD1.15 MD1.16 MD1.17 MD1.18 MD1.19 MD1.20 P1.3 P1.9 P1.10 SW1.2 SW1.4 SW2.2 SW2.4 SW3.2 SW3.4 SW4.2 SW4.4 SW5.2 SW5.4 SW6.2 SW6.4 SW7.2 SW7.3 SW8.2 SW8.3 U1.B1B U1.B2B U2.4 U3.B1B U3.B2B U4.3 U4.4 U4.5 U4.6

## Polygon pours and split planes (outlines as drawn)
GND on Top Layer "GND_L01_P000" (solid, pour order 0): 7637.8,0 7244.09,393.7 7244.09,5039.37 708.66,5039.37 0,4330.71 0,0
GND on Bottom Layer "GND_L02_P001" (solid, pour order 1): 78.74,4960.63 78.74,78.74 0,0 7874.02,0 7874.02,5196.85 7716.54,5354.33

## Silkscreen, mask and mechanical layers (free items; w line width, h text height)
Top Overlay:
  drawing of 13 lines, arcs and shapes, not listed
  text "(c) / MCI RACING / PANDAS" at 5000,3897.64 h60
Mechanical 1:
  lines w0.5: 1035.83,3161.73 3771.02,3161.73 6506.2,3161.73 5138.61,3161.73 ; 1719.63,3161.73 1719.63,4253.51 ; 2403.42,1882.2 2403.42,3161.73 2403.42,4441.26 ; 2403.42,3801.49 5138.61,3801.49 ; 3087.22,1882.2 3087.22,2521.96 3087.22,3161.73 ; 3771.02,2521.96 2403.42,2521.96 5138.61,2521.96 ; 4454.81,1882.2 4454.81,2521.96 4454.81,3161.73 ; 5138.61,1882.2 5138.61,3161.73 ; 5138.61,4441.26 5138.61,3161.73 ; 5822.4,3161.73 5822.4,4253.51 ; 621.41,897.95 cw(c7011.57,897.95) 1389.29,3935.07 ; 621.41,897.95 ccw(c1211.96,897.95) 1211.96,307.4 ; 621.41,897.95 ccw(c1211.96,897.95) 1211.96,307.4 ; 621.41,897.95 cw(c7011.57,897.95) 1389.29,3935.07 ; 1211.96,307.4 1964.91,1512.12 ; 1211.96,307.4 1964.91,1512.12 ; 1389.29,3935.07 cw(c2358.56,3260.15) 2358.56,4441.26 ; 1389.29,3935.07 cw(c2358.56,3260.15) 2358.56,4441.26 ; 1964.91,1512.12 cw(c2632.63,1094.8) 2632.63,1882.2 ; 1964.91,1512.12 cw(c2632.63,1094.8) 2632.63,1882.2 ; 2358.56,4441.26 3771.02,4441.26 ; 2358.56,4441.26 3771.02,4441.26 ; 2632.63,1882.2 3771.02,1882.2 ; 2632.63,1882.2 3771.02,1882.2 ; 3771.02,1882.2 3771.02,4441.26 ; 3771.02,1882.2 4909.4,1882.2 ; 3771.02,1882.2 4909.4,1882.2 ; 3771.02,4441.26 5183.47,4441.26 ; 3771.02,4441.26 5183.47,4441.26 ; 4909.4,1882.2 cw(c4909.4,1094.8) 5577.12,1512.12 ; 4909.4,1882.2 cw(c4909.4,1094.8) 5577.12,1512.12 ; 5183.47,4441.26 cw(c5183.47,3260.15) 6152.74,3935.07 ; 5183.47,4441.26 cw(c5183.47,3260.15) 6152.74,3935.07 ; 5577.12,1512.12 6330.07,307.4 ; 5577.12,1512.12 6330.07,307.4 ; 6152.74,3935.07 cw(c530.46,897.95) 6920.62,897.95 ; 6152.74,3935.07 cw(c530.46,897.95) 6920.62,897.95 ; 6330.07,307.4 ccw(c6330.07,897.95) 6920.62,897.95